# Altium PCB PCB1.PcbDoc
Units mil, origin at the board's own origin, x right, y up, seen from the top; angles counter-clockwise.
Board outline 1010 x 2190 mil, 2 copper layers (L1 (Signal), L4 (Signal)), stack 62.677 mil thick; 37 components, 48 nets, 169 pads, 49 vias.
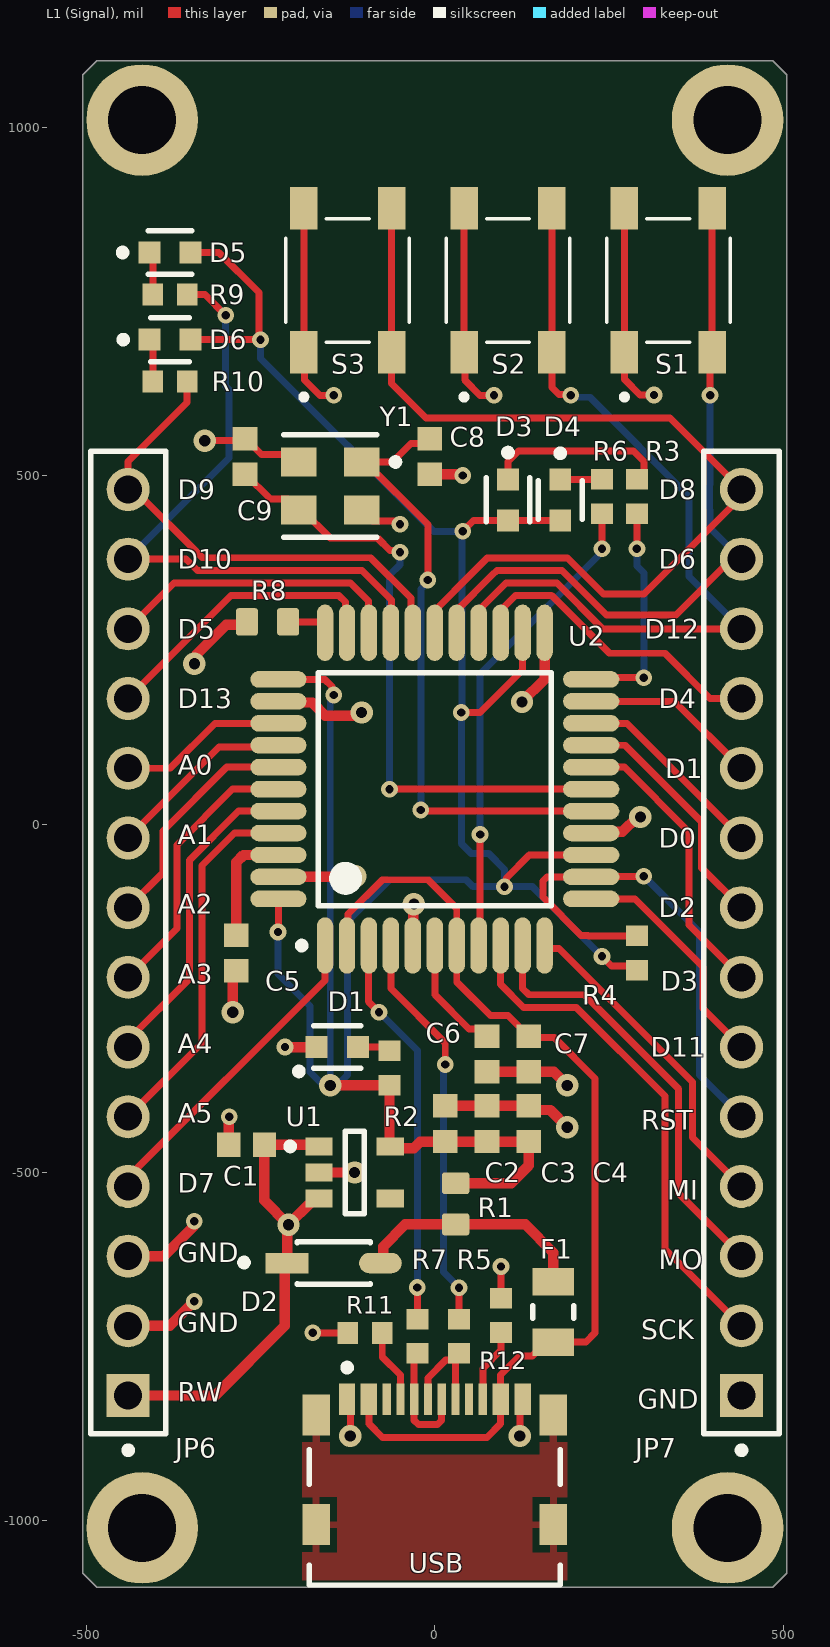
[diagram p0: L1 (Signal) view]
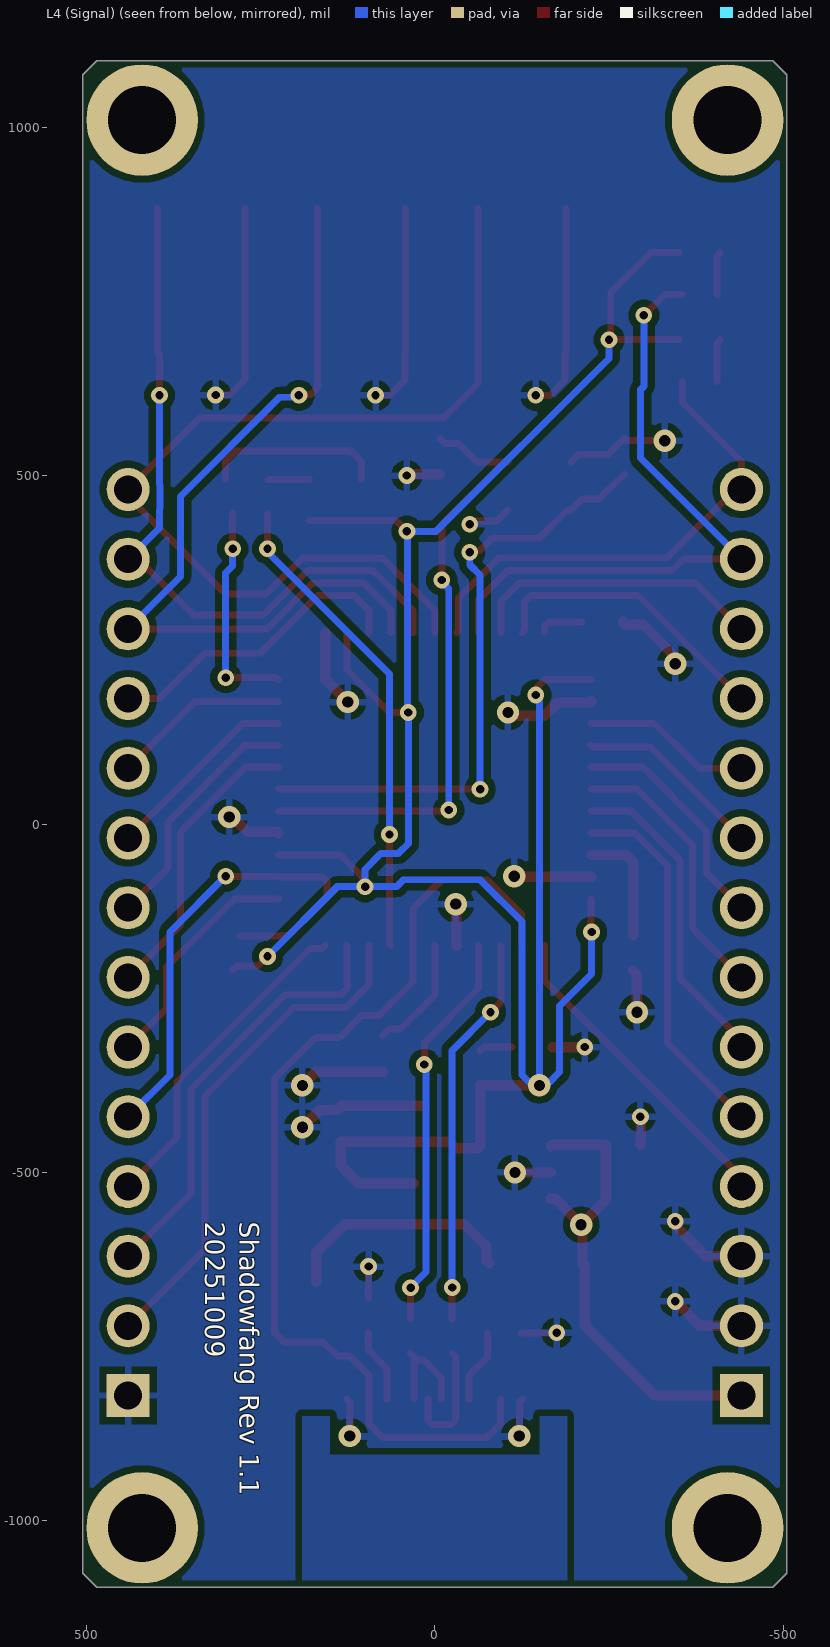
[diagram p1: L4 (Signal) view, seen from below]
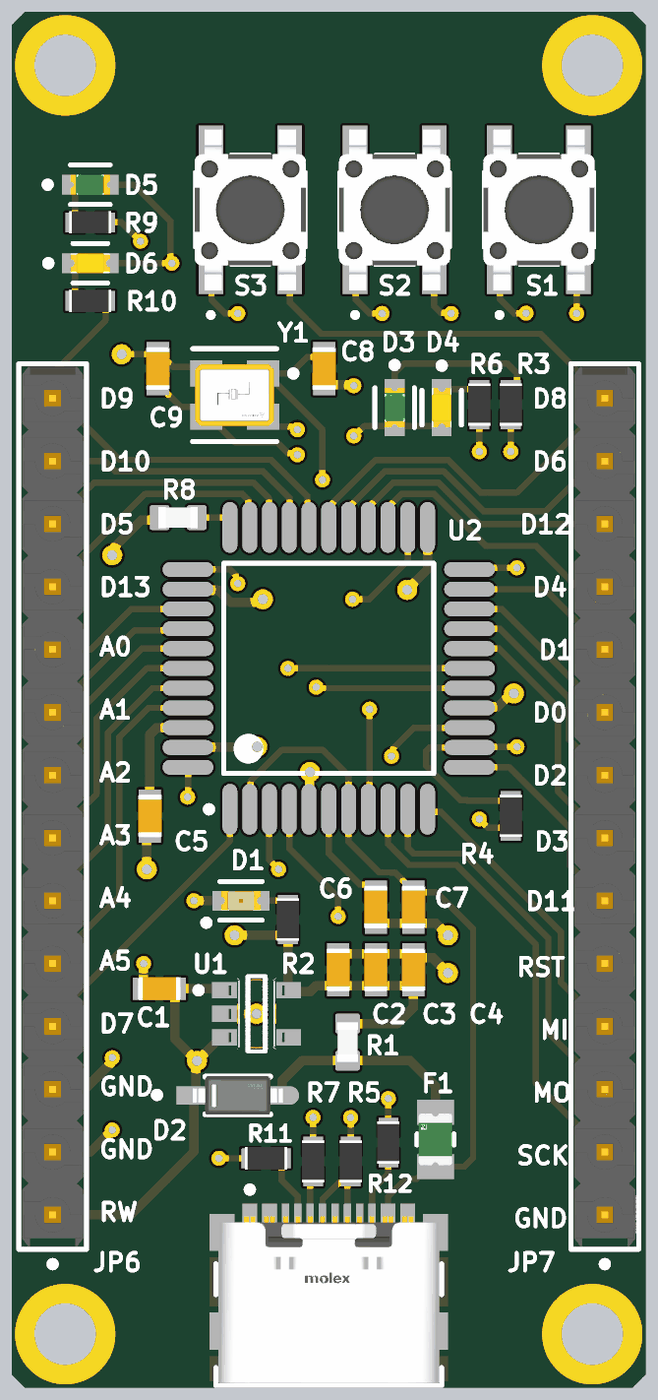
[diagram p2: 3D render of the assembled board from above, using the file's embedded part models]

## Layer stack, top to bottom
Top Solder: solder mask 0.4, Solder Resist, Dk 3.5
L1 (Signal): signal copper 1.378
Dielectric 2: core 59.9213, FR-4, Dk 4.6
L4 (Signal): signal copper 1.378
Bottom Solder: solder mask 0.4, Solder Resist, Dk 3.5

## Board outline
-505,-1075 -485,-1095 485,-1095 505,-1075 505,1075 485,1095 -485,1095 -505,1075

## Design rules (kind name [scope] priority, off if disabled: settings)
Clearance Clearance_PCBW [All] p1: gap=10 ignorepadtopadclearanceinfootprint=FALSE except(6: SMDPad-SMDPad; 8: Arc-Arc Arc-Track Arc-SMDPad Arc-THPad Track-Track Track-SMDPad Track-THPad)
Clearance [All] p2: gap=10 ignorepadtopadclearanceinfootprint=FALSE
MinimumSolderMaskSliver MinimumSolderMaskSliver_PCBWAY [All] p1: minsoldermaskwidth=6
MinimumSolderMaskSliver [All] p2: minsoldermaskwidth=10
PolygonConnect [All] p1: connectstyle=Relief reliefconductorwidth=10 reliefentries=4 polygonreliefangle="90 Angle" airgapwidth=10
RoutingVias RoutingVias_1 [All] p1: holewidth=12 width=24 viastyle="Through Hole" minholewidth=12 minwidth=24 maxholewidth=32 maxwidth=32
RoutingVias [All] p2: holewidth=28 width=50 viastyle="Through Hole" minholewidth=28 minwidth=50 maxholewidth=28 maxwidth=50
SilkToSilkClearance SilkToSilkClearance_PCBWAY [All] p1: silktosilkclearance=8
SilkToSilkClearance [All] p2: silktosilkclearance=10
SilkToSolderMaskClearance SilkToSolderMaskClearance_PCBWAY [IsPad] p1: minsilkscreentomaskgap=8 clearancetoexposedcopper=TRUE
SilkToSolderMaskClearance [IsPad] p2: minsilkscreentomaskgap=10 clearancetoexposedcopper=TRUE
SolderMaskExpansion [All] p1: expansion=4 istentingtop=FALSE
SupplyNets "Schematic Supply Nets_3" [InNet('SHIELD')] p1: voltage=0.000
SupplyNets "Schematic Supply Nets_2" [InNet('UVCC')] p2: voltage=0.000
SupplyNets "Schematic Supply Nets_1" [InNet('VCC')] p3: voltage=0.000
SupplyNets "Schematic Supply Nets" [InNet('GND')] p4: voltage=0.000
Width [All] p1: maxlimit=15 minlimit=10 preferedwidth=10 minimp=50.000000 maximp=50.000000 favimp=50.000000
27 further rules are at their usual default settings.

## Components (designator, comment, footprint, x,y, rotation, side; value= is the part's Value field where it differs from the comment)
C1 "CAP GENERIC 0603" CAPC1608X09L -270,-460 r0 top
C2 "CAP GENERIC 0603" CAPC1608X09L 15,-430 r270 top
C3 "CAP GENERIC 0603" CAPC1608X09L 75,-430 r270 top
C4 "CAP GENERIC 0603" CAPC1608X09L 135,-430 r270 top
C5 "CAP GENERIC 0603" CAPC1608X09L -285,-185 r90 top
C6 "CAP GENERIC 0603" CAPC1608X09L 75,-330 r90 top
C7 "CAP GENERIC 0603" CAPC1608X09L 135,-330 r90 top
C8 "CAP GENERIC 0603" CAPC1608X09L -7.34,527.33 r90 top
C9 "CAP GENERIC 0603" CAPC1608X09L -272.34,527.33 r270 top
D1 "Red" FP-LTST-C191KRKT-MFG -140,-320 r0 top
D2 "1N5819HW-7-F" FP-SOD123-IPC_A -145,-630 r0 top
D3 "Green" FP-LTST-C191KGKT-MFG 105,465 r270 top
D4 "Yellow" FP-LTST-C191KSKT-MFG 180,465 r270 top
D5 "Green" FP-LTST-C191KGKT-MFG -380,820 r0 top
D6 "Yellow" FP-LTST-C191KSKT-MFG -380,695 r0 top
F1 "0805L050WR" FP-0805L-MFG 170,-700 r90 top value=0.15-0.85Ω
JP6 "22-28-4146" FP-22-28-4146-MFG -440,-170 r90 top locked
JP7 "22-28-4146" FP-22-28-4146-MFG 440,-170 r90 top locked
R1 "0" RES_0603 30,-545 r90 top
R2 "GENERIC 0603 RESISTOR" RESC1608X06L -65,-350 r270 top
R3 "GENERIC 0603 RESISTOR" RESC1608X06L 290,470 r90 top
R4 "GENERIC 0603 RESISTOR" RESC1608X06L 290,-185 r90 top
R5 "GENERIC 0603 RESISTOR" RESC1608X06L 35,-735 r90 top
R6 "GENERIC 0603 RESISTOR" RESC1608X06L 240,470 r90 top
R7 "GENERIC 0603 RESISTOR" RESC1608X06L -25,-735 r90 top
R8 "0" RES_0603 -240,290 r180 top
R9 "GENERIC 0603 RESISTOR" RESC1608X06L -380,760 r180 top
R10 "GENERIC 0603 RESISTOR" RESC1608X06L -380,635 r180 top
R11 "GENERIC 0603 RESISTOR" RESC1608X06L -100,-730 r180 top
R12 "GENERIC 0603 RESISTOR" RESC1608X06L 95,-705 r90 top
S1 "PTS_647_SN50_SMTR2_LFS" SW_PTS_647_SN50_SMTR2_LFS 335.01,780 r90 top
S2 "PTS_647_SN50_SMTR2_LFS" SW_PTS_647_SN50_SMTR2_LFS 105,780 r90 top
S3 "PTS_647_SN50_SMTR2_LFS" SW_PTS_647_SN50_SMTR2_LFS -125,780 r90 top
U1 "MIC5219-5.0YM5-TR" FP-SOT23-5LD-PL-1-MFG -115,-500 r0 top
U2 "ATmega32U4-AU" 44ML_M 0,50 r90 top locked
USB "217179-0001" FP-2171790001-MFG 0,-960 r0 top locked
Y1 "ABM8-16.000MHZ-B2-T" FP-ABM8-MFG -150,485 r180 top

## Footprints (in the part's own frame and the unit in brackets; to place one, negate y for a bottom-side part, rotate by r counter-clockwise, add the part's x,y. Pads: shape width x height; smd on the part's side, far side on the other; paste and mask are expansions set on the pad)
44ML_M [mm] "Thin QFP, 44-Leads, Body 10x10mm, Pitch 0.8mm, IPC Low Density"
  oval 2.05x0.6 smd: 1(-5.7,4) 2(-5.7,3.2) 3(-5.7,2.4) 4(-5.7,1.6) 5(-5.7,0.8) 6(-5.7,0) 7(-5.7,-0.8) 8(-5.7,-1.6) 9(-5.7,-2.4) 10(-5.7,-3.2) 11(-5.7,-4) 23(5.7,-4) 24(5.7,-3.2) 25(5.7,-2.4) 26(5.7,-1.6) 27(5.7,-0.8) 28(5.7,0) 29(5.7,0.8) 30(5.7,1.6) 31(5.7,2.4) 32(5.7,3.2) 33(5.7,4)
  oval 0.6x2.05 smd: 12(-4,-5.7) 13(-3.2,-5.7) 14(-2.4,-5.7) 15(-1.6,-5.7) 16(-0.8,-5.7) 17(0,-5.7) 18(0.8,-5.7) 19(1.6,-5.7) 20(2.4,-5.7) 21(3.2,-5.7) 22(4,-5.7) 34(4,5.7) 35(3.2,5.7) 36(2.4,5.7) 37(1.6,5.7) 38(0.8,5.7) 39(0,5.7) 40(-0.8,5.7) 41(-1.6,5.7) 42(-2.4,5.7) 43(-3.2,5.7) 44(-4,5.7)
  silkscreen extent -5.82,-4.25 4.25,4.97, body extent -5,-5 5,5, height 1.2
CAPC1608X09L [mm] "Chip Capacitor, 2-Leads, Body 1.60x0.80mm, IPC High Density"
  rect 0.85x0.9 smd: 1(-0.65,0) 2(0.65,0)
  body extent -0.87,-0.48 0.87,0.48, height 0.9
FP-22-28-4146-MFG [mm]
  rect 1.57x1.57 hole 1.02 paste-2539.97 mask+0: 1(-16.51,0)
  round 1.57 hole 1.02 paste-2539.97 mask+0: 2(-13.97,0) 3(-11.43,0) 4(-8.89,0) 5(-6.35,0) 6(-3.81,0) 7(-1.27,0) 8(1.27,0) 9(3.81,0) 10(6.35,0) 11(8.89,0) 12(11.43,0) 13(13.97,0) 14(16.51,0)
  silkscreen extent -18.63,-1.37 17.91,1.37, body extent -18.01,-1.47 18.01,1.47, height 0.25
FP-0805L-MFG [mm]
  rect 1x1.5 smd paste+0 mask+0: 1(-1.1,0) 2(1.1,0)
  silkscreen extent -0.23,-0.75 0.23,0.75, body extent -1.7,-0.85 1.7,0.85, height 0.25
FP-2171790001-MFG [mm]
  rect 1x1.5 smd paste+0 mask+0: 1(-4.32,2.85) 2(4.32,2.85) 3(-4.32,-1.15) 4(4.32,-1.15)
  rect 0.6x1.15 smd paste+0 mask+0: A1-B12(-3.2,3.425) A4-B9(-2.4,3.425) B1-A12(3.2,3.425) B4-A9(2.4,3.425)
  rect 0.3x1.15 smd paste+0 mask+0: A5(-1.25,3.425) A6(-0.25,3.425) A7(0.25,3.425) A8(1.25,3.425) B5(1.75,3.425) B6(0.75,3.425) B7(-0.75,3.425) B8(-1.75,3.425)
  silkscreen extent -4.57,-3.35 4.57,4.7, body extent -4.92,-3.45 4.92,4.1, height 0.25
FP-ABM8-MFG [mm]
  rect 1.3x1.05 smd paste+0 mask+0: 1(-1.15,-0.875) 2(1.15,-0.875) 3(1.15,0.875) 4(-1.15,0.875)
  silkscreen extent -2.5,-1.88 1.7,1.88, body extent -1.9,-1.5 1.9,1.5, height 0.25
FP-LTST-C191KGKT-MFG [mm]
  rect 0.8x0.8 smd paste+0 mask+0: 1(-0.75,0) 2(0.75,0)
  silkscreen extent -1.85,-0.8 0.8,0.8, body extent -1.25,-0.55 1.25,0.55, height 0.25
FP-LTST-C191KRKT-MFG [mm]
  rect 0.8x0.8 smd paste+0 mask+0: 1(-0.75,0) 2(0.75,0)
  silkscreen extent -1.52,-1.01 0.86,0.78, body extent -1.25,-0.55 1.25,0.55, height 0.25
FP-LTST-C191KSKT-MFG [mm]
  rect 0.8x0.8 smd paste+0 mask+0: 1(-0.75,0) 2(0.75,0)
  silkscreen extent -1.82,-0.8 0.7,0.8, body extent -1.25,-0.55 1.25,0.55, height 0.25
FP-SOD123-IPC_A [mil]
  rect 61.32x29.23 smd paste+0 mask+0: 1(-66.94,0)
  rrect100% 61.32x29.23 smd paste+0 mask+0: 2(66.94,0)
  silkscreen extent -134,-31 52,31, body extent -117,-50 117,50, height 10
FP-SOT23-5LD-PL-1-MFG [mm]
  rect 1x0.66 smd paste+0 mask+0: 1(-1.3,0.95) 2(-1.3,0) 3(-1.3,-0.95) 4(1.3,-0.95) 5(1.3,0.95)
  silkscreen extent -2.47,-1.5 0.35,1.5, body extent -1.9,-1.6 1.9,1.6, height 0.25
RES_0603 [mm]
  rrect25% 0.8x1 smd: 1(-0.75,0) 2(0.75,0)
  body extent -0.8,-0.43 0.8,0.43, height 0.52
RESC1608X06L [mm] "Chip Resistor, 2-Leads, Body 1.60x0.80mm, IPC High Density"
  rect 0.75x0.8 smd: 1(-0.625,0) 2(0.625,0)
  body extent -0.85,-0.45 0.85,0.45, height 0.55
SW_PTS_647_SN50_SMTR2_LFS [mm]
  rect 1.55x1 smd: 1(-2.625,1.6) 2(2.625,1.6) 3(-2.625,-1.6) 4(2.625,-1.6)
  silkscreen extent -4.35,-2.25 2.25,2.25, body extent -3.25,-2.25 3.25,2.25, height 5

## Part data
C1 C2: library part CAP0603, Capacitance=10uF, Manufacturer Part Number=GRM188R61C106MAALD
C3 C6 C7: library part CAP0603, Capacitance=1uF, Manufacturer Part Number=GCM188R71E105KA64D
C4 C5: library part CAP0603, Capacitance=0.1uF, Manufacturer Part Number=GCM188R71H104KA57D
C8 C9: library part CAP0603, Capacitance=22pF, Manufacturer Part Number=GCM1885C2A220FA16D
D1: library part CMP-2000-05199-2, Case Code (Imperial)=0603, Case Code (Metric)=1608, Current=2A, Forward Current=20mA, Forward Voltage=2V, Lens Color=Colorless, Manufacturer="Vishay Lite-On", Manufacturer Part Number=LTST-C191KRKT, Max Operating Temperature=85°C, Min Operating Temperature=-55°C, Power Dissipation=75mW, Reverse Voltage=5V, Supplier Part Number=160-1447-1-ND, Case/Package=0603, Category=LEDs, Channels=1, Color=Red, Color@wavelength=Red, ComponentLink1Description=https://datasheet.ciiva.com:443/pdfs/VipMasterIC/IC/LITE/LITE-S-A0003156012/LITE-S-A0003156012-1.pdf?src-supplier=IHS+Markit, ComponentLink1URL=https://datasheet.ciiva.com:443/pdfs/VipMasterIC/IC/LITE/LITE-S-A0003156012/LITE-S-A0003156012-1.pdf?src-supplier=IHS+Markit, ComponentLink2Description=https://datasheet.ciiva.com/16212/ltst-c191krkt-16212419.pdf?src-supplier=Future+Electronics, ComponentLink2URL=https://datasheet.ciiva.com/16212/ltst-c191krkt-16212419.pdf?src-supplier=Future+Electronics, ComponentLink3Description=https://datasheet.ciiva.com/12400/lite-on-ltst-c191krkt-190135-12400910.pdf?src-supplier=Mouser, ComponentLink3URL=https://datasheet.ciiva.com/12400/lite-on-ltst-c191krkt-190135-12400910.pdf?src-supplier=Mouser, ComponentLink4Description=https://datasheet.ciiva.com/11773/0900766b80dc02b2-11773601.pdf?src-supplier=Rs, ComponentLink4URL=https://datasheet.ciiva.com/11773/0900766b80dc02b2-11773601.pdf?src-supplier=Rs, ComponentLink5Description=https://datasheet.ciiva.com/15117/getdatasheetpartid-141922-15117737.pdf?src-supplier=Verical, ComponentLink5URL=https://datasheet.ciiva.com/15117/getdatasheetpartid-141922-15117737.pdf?src-supplier=Verical, ComponentLink6Description=https://datasheet.ciiva.com/2109/s-110-ltst-c191krkt-2109970.pdf?src-supplier=Digikey, ComponentLink6URL=https://datasheet.ciiva.com/2109/s-110-ltst-c191krkt-2109970.pdf?src-supplier=Digikey, ComponentLink7Description=https://datasheet.ciiva.com/2109/s-110-ltst-c191krkt-2109971.pdf?src-supplier=Digikey, ComponentLink7URL=https://datasheet.ciiva.com/2109/s-110-ltst-c191krkt-2109971.pdf?src-supplier=Digikey, ComponentLink8Description=https://datasheet.ciiva.com/2109/s-110-ltst-c191krkt-2109972.pdf?src-supplier=Digikey, ComponentLink8URL=https://datasheet.ciiva.com/2109/s-110-ltst-c191krkt-2109972.pdf?src-supplier=Digikey, Depth=800µm, Dominant Wavelength=631nm, Height=550µm, Illumination Color=Red, JESD-609 Code=e3, Lead Free="Lead Free", Length=1.6mm, Lens Style=Clear, Lens Transparency=Clear, Luminous Intensity=54mcd, Luminous Intensity-Nom=54mcd, Mount="Surface Mount", Mounting Technology="Surface Mount", NexarPartId=549908, Number of Elements=1, Number of LEDs=1, Number of Pins=2, Optoelectronic Device Type="SINGLE COLOR LED", Overall Height=0.55mm, Packaging="Tape and Reel", Pins=2, Power Rating=75mW, Pricing="1=0.15, 10=0.1, 100=0.0687, 500=0.05446, 1000=0.0497, 2000=0.04563, 5000=0.04114, 10000=0.03833, 15000=0.03689, 25000=0.03525, 35000=0.03428, 50000=0.03333, 125000=0.03123, 250000=0.02992 (USD)", Radiation Hardening=No, Reach SVHC Compliant=Yes, Reverse Voltage-Max=5V, RoHS=Compliant, RoHS Compliant=Yes, Schedule B="8541402000, 8541402000", Shape=Rectangular, Size=1.1mm, Stock=867088, Supplier=Digikey, Terminal Finish=Tin, Terminal Pitch=1.5mm, Test Current=20mA, Viewing Angle=130°, Voltage=2V, Wavelength=639nm, Width=800µm
D2: library part CMP-0303-00003-3, "DIODE SCHOTTKY 40V 1A SOD123", Average Rectified Current=1A, Capacitance=110pF, Case/Package=SOD-123-2, Forward Voltage=450mV, Manufacturer=Diodes, Max Forward Surge Current (Ifsm)=25A, Max Operating Temperature=125°C, Max Power Dissipation=450mW, Max Repetitive Reverse Voltage (Vrrm)=40V, Min Operating Temperature=-65°C, Package Body Material=Plastic, Package Quantity=3000, Package Shape=Rectangular, Package Style="SMALL OUTLINEMeter", Peak Reflow Temperature (Cel)=260°C, Peak Reverse Current=50uA, Supplier Part Number=1N5819HW-FDICT-ND, Time @ Peak Reflow Temperature-Max (s)=40s, Category="Schottky Diodes", ComponentLink1Description=https://datasheet.ciiva.com:443/pdfs/VipMasterIC/IC/DIOD/DIOD-S-A0009689747/DIOD-S-A0009691035-1.pdf?src-supplier=IHS+Markit, ComponentLink1URL=https://datasheet.ciiva.com:443/pdfs/VipMasterIC/IC/DIOD/DIOD-S-A0009689747/DIOD-S-A0009691035-1.pdf?src-supplier=IHS+Markit, Contact Plating=Tin, Current Rating=1A, Diode Element Material=SILICON, Diode Type=RECTIFIER, Element Configuration=Single, Forward Current=1A, Height=1.25mm, JESD-30 Code=R-PDSO-G2, JESD-609 Code=e3, Lead Free="Lead Free", Length=2.85mm, Manufacturer Part Number=1N5819HW-7-F, Max Output current=1A, Max Reverse Voltage (DC)=40V, Moisture Sensitivity Level=1, Non-rep Pk Forward Current-Max=25A, Number of Elements=1, Number of Pins=2, Output Current=1A, Packaging="Tape and Reel", Peak Non-Repetitive Surge Current=25A, Pins=2, Polarity=Standard, Pricing="1=0.23, 10=0.143, 100=0.1103, 500=0.09626, 1000=0.08516, 3000=0.05656, 6000=0.0532, 9000=0.05304, 15000=0.03424 (USD)", Qualification Status="Not Qualified", Radiation Hardening=No, REACH SVHC="No SVHC", Reach SVHC Compliant=Yes, Rep Pk Reverse Voltage-Max=40V, RoHS=Yes, RoHS Compliant=Yes, Stock=233752, Supplier=Digikey, Surface Mount=Yes, Technology=SCHOTTKY, Terminal Finish=Tin, Terminal Form="Gull Wing", Terminal Position=DUAL, Termination=SMD/SMT, Voltage Rating (DC)=40V, Weight=0.000353oz, Width=1.7mm
D3 D5: library part CMP-2000-05198-4, "LED GREEN CLEAR SMD", Case Code (Imperial)=0603, Case Code (Metric)=1608, Forward Current=20mA, Forward Voltage=2V, Lens Color="Clear, Colorless", Manufacturer="Vishay Lite-On", Manufacturer Part Number=LTST-C191KGKT, Max Operating Temperature=85°C, Min Operating Temperature=-55°C, Power Dissipation=75mW, Reverse Voltage=5V, Supplier Part Number=160-1446-1-ND, Case/Package=0603, Channels=1, Color=Green, Color@wavelength=Green, ComponentLink1Description=https://datasheet.ciiva.com:443/pdfs/VipMasterIC/IC/LITE/LITE-S-A0003156116/LITE-S-A0003156116-1.pdf?src-supplier=IHS+Markit, ComponentLink1URL=https://datasheet.ciiva.com:443/pdfs/VipMasterIC/IC/LITE/LITE-S-A0003156116/LITE-S-A0003156116-1.pdf?src-supplier=IHS+Markit, ComponentLink2Description=https://datasheet.ciiva.com/2109/ltst-c191kgkt-2109973.pdf?src-supplier=Digikey, ComponentLink2URL=https://datasheet.ciiva.com/2109/ltst-c191kgkt-2109973.pdf?src-supplier=Digikey, Depth=800µm, Dominant Wavelength=571nm, Height=550µm, Illumination Color=Green, JESD-609 Code=e3, Lead Free="Lead Free", Length=1.6mm, Lens Style=Clear, Lens Transparency=Clear, Luminous Intensity=35mcd, Luminous Intensity-Nom=35mcd, Mount="Surface Mount", Mounting Technology="Surface Mount", NexarPartId=549907, Number of Elements=1, Number of LEDs=1, Number of Pins=2, Optoelectronic Device Type="SINGLE COLOR LED", Overall Height=0.55mm, Packaging="Tape and Reel", Pins=2, Power Rating=75mW, Pricing="1=0.15, 10=0.1, 100=0.0688, 500=0.05448, 1000=0.04972, 2000=0.04564, 5000=0.04116, 10000=0.03835, 15000=0.0369, 25000=0.03527, 35000=0.03429, 50000=0.03334, 125000=0.03124, 250000=0.02993 (USD)", Radiation Hardening=No, Reach SVHC Compliant=Yes, Reverse Voltage-Max=5V, RoHS=Compliant, RoHS Compliant=Yes, Schedule B="8541402000, 8541402000", Shape=Rectangular, Size=1.1mm, Stock=1664852, Supplier=Digikey, Terminal Finish=Tin, Terminal Pitch=1.5mm, Test Current=20mA, Viewing Angle=130°, Wavelength=574nm, Width=800µm
D4 D6: library part CMP-22017-000025-1, "LED YELLOW CLEAR SMD", Case Code (Imperial)=0603, Case Code (Metric)=1608, Forward Current=30mA, Forward Voltage=2.4V, Lens Color=Colorless, Manufacturer="Vishay Lite-On", Manufacturer Part Number=LTST-C191KSKT, Max Operating Temperature=85°C, Min Operating Temperature=-55°C, Package Quantity=1, Power Dissipation=75mW, Reverse Voltage=5V, Supplier Part Number=160-1448-1-ND, Test Current=20mA, Case/Package=0603, Category=LEDs, Channels=1, Color=Yellow, Color@wavelength=Yellow, ComponentLink1Description=https://datasheet.ciiva.com:443/pdfs/VipMasterIC/IC/LITE/LITE-S-A0008870965/LITE-S-A0008870965-1.pdf?src-supplier=IHS+Markit, ComponentLink1URL=https://datasheet.ciiva.com:443/pdfs/VipMasterIC/IC/LITE/LITE-S-A0008870965/LITE-S-A0008870965-1.pdf?src-supplier=IHS+Markit, ComponentLink2Description=https://datasheet.ciiva.com/12400/lite-on-ltst-c191kskt-190097-12400797.pdf?src-supplier=Mouser, ComponentLink2URL=https://datasheet.ciiva.com/12400/lite-on-ltst-c191kskt-190097-12400797.pdf?src-supplier=Mouser, ComponentLink3Description=https://datasheet.ciiva.com/11773/0900766b80dc02b3-11773512.pdf?src-supplier=Rs, ComponentLink3URL=https://datasheet.ciiva.com/11773/0900766b80dc02b3-11773512.pdf?src-supplier=Rs, ComponentLink4Description=https://datasheet.ciiva.com/16213/lite-on20ltst-c191kskt-16213725.pdf?src-supplier=Future+Electronics, ComponentLink4URL=https://datasheet.ciiva.com/16213/lite-on20ltst-c191kskt-16213725.pdf?src-supplier=Future+Electronics, ComponentLink5Description=https://datasheet.ciiva.com/15117/getdatasheetpartid-141495-15117732.pdf?src-supplier=Verical, ComponentLink5URL=https://datasheet.ciiva.com/15117/getdatasheetpartid-141495-15117732.pdf?src-supplier=Verical, ComponentLink6Description=https://datasheet.ciiva.com/2109/s-110-ltst-c191kskt-2109984.pdf?src-supplier=Digikey, ComponentLink6URL=https://datasheet.ciiva.com/2109/s-110-ltst-c191kskt-2109984.pdf?src-supplier=Digikey, Depth=0.8mm, Dominant Wavelength=597nm, Height=0.55mm, Illumination Color=Yellow, JESD-609 Code=e3, Lead Free="Lead Free", Length=1.6mm, Lens Style=Diffused, Lens Transparency=Clear, Luminous Intensity=180mcd, Luminous Intensity-Nom=104mcd, Mount="Surface Mount", Mounting Technology="Surface Mount", Number of Elements=1, Number of LEDs=1, Number of Pins=2, Optoelectronic Device Type="SINGLE COLOR LED", Overall Height=0.55mm, Packaging="Tape and Reel", Pins=2, Power Rating=75mW, Pricing="1=0.15, 10=0.105, 100=0.0723, 500=0.05736, 1000=0.05238, 2000=0.04813, 5000=0.04344, 10000=0.0405, 15000=0.03899, 25000=0.03728, 35000=0.03627, 50000=0.03527, 125000=0.03308, 250000=0.03171 (USD)", Radiation Hardening=No, Reach SVHC Compliant=Yes, Reverse Voltage-Max=5V, RoHS=Yes, RoHS Compliant=Yes, Shape=Rectangular, Size=1.1mm, Stock=620459, Supplier=Digikey, Terminal Finish=Tin, Terminal Pitch=1.5mm, Viewing Angle=130°, Wavelength=588nm, Width=0.8mm
F1: library part CMP-08606-000023-1, "PTC RESET FUSE 6V 500MA 0805", Ambient Temperature Range High=+85°C, Ambient Temperature Range Low=-40°C, Current Rating=100A, Hold Current=0.5A, Manufacturer="Littelfuse Inc.", Package=0805L, Resistance=0.15-0.85Ω, Temperature="-40°C to +85°C", Trip Current=1A, Voltage Rating=6V, Automotive=No, Category=Fuse, ComponentLink2Description=Datasheet, ComponentLink2URL=https://www.littelfuse.com/~/media/electronics/datasheets/resettable_ptcs/littelfuse_ptc_0805l_datasheet.pdf.pdf, Device Class L1="Circuit Protection", Device Class L2="PTC Resettable Fuses", Device Class L3=unset, Digikey Description="PTC RESET FUSE 6V 500MA 0805", Height=1.25mm, Lead Free=Yes, Manufacturer Part Number=0805L050WR, Mouser Description="PTC Resettable Fuse 0.5A(hold) 1A(trip) 6VDC 100A 0.5W 0.1s 0.15Ohm SMD Solder Pad 0805 T/R", Octopart=https://octopart.com/0805l050wr-littelfuse-673858, RoHS=TRUE, Temperature Range High=+85°C, Temperature Range Low=-40°C, Trip Time=0.1s
JP6 JP7: "CONN HEADER VERT 14POS 2.54MM", Color=Black, Contact Resistance=10mR, Current Rating=4A, Flammability Rating="UL94 V-0", Insulation Resistance=1GR, Manufacturer=Molex, Manufacturer Series=42375, Package Quantity=1, Supplier Part Number=WM24210-ND, Voltage Rating=250V, Body Breadth=0.098inch, Body Depth=0.09inch, Body Length=1.4inch, Body/Shell Style=RECEPTACLE, Category="Headers and Wire Housings", ComponentLink1Description=https://datasheet.ciiva.com:443/pdfs/VipMasterIC/IC/MOLE/MOLE-S-A0003536348/MOLE-S-A0003536348-1.pdf?src-supplier=IHS+Markit, ComponentLink1URL=https://datasheet.ciiva.com:443/pdfs/VipMasterIC/IC/MOLE/MOLE-S-A0003536348/MOLE-S-A0003536348-1.pdf?src-supplier=IHS+Markit, ComponentLink2Description=https://datasheet.ciiva.com/6814/022284363-sd-6814049.pdf?src-supplier=Digikey, ComponentLink2URL=https://datasheet.ciiva.com/6814/022284363-sd-6814049.pdf?src-supplier=Digikey, ComponentLink3Description=https://datasheet.ciiva.com/10079/0022284146-pcb-headers-10079164.pdf?src-supplier=Avnet, ComponentLink3URL=https://datasheet.ciiva.com/10079/0022284146-pcb-headers-10079164.pdf?src-supplier=Avnet, ComponentLink4Description=https://datasheet.ciiva.com/5163/0022284146-pcb-headers-228333-5163807.pdf?src-supplier=Mouser, ComponentLink4URL=https://datasheet.ciiva.com/5163/0022284146-pcb-headers-228333-5163807.pdf?src-supplier=Mouser, Connector Type="Male Pin", Contact Finish - Mating="NOT SPECIFIED", Contact Finish - Termination="TIN OVER NICKEL", Contact Gender=Male, Contact Material=Brass, Contact Mating Length=0.24inch, Contact Pattern=RECTANGULAR, Contact Plating=Gold, Contact Style="SQ PIN-SKT", Contact Type="Male Pin", DIN Conformance=No, Filter Feature=No, Gender=Male, Glow Wire Compliant=Non-compliant, Height=2.29mm, Housing Color=Black, Housing Material=Thermoplastic, IEC Conformance=No, Insertion Force-Max=4.8928N, Insulation Color=Black, Insulation Material=Nylon, Lead Free="Lead Free", Length=35.6mm, Manufacturer Part Number=22-28-4146, Mating Contact Pitch=0.1inch, Mating Information="MULTIPLE MATING PARTS AVAILABLE", MIL Conformance=No, Mixed Contacts=No, Mount="Through Hole", Mounting Option 1=LOCKING, Mounting Style=STRAIGHT, Mounting Technology=Board, Number of Circuits=14, Number Of Connectors=1, Number of Contacts=14, Number Of PCB Rows=1, Number of Positions=14, Number of Rows=1, Number of Rows Loaded=1, Option="General Purpose", Orientation=Vertical, Packaging=Bulk, PCB Contact Pattern=RECTANGULAR, Pitch=0.1inch, Plating Thickness=100uin, Pricing="1=0.91, 10=0.772, 100=0.6562, 500=0.58568, 1000=0.55772, 5000=0.49786, 10000=0.47411 (USD)", Reach SVHC Compliant=Yes, Reference Standard=UL, Reliability=COMMERCIAL, RoHS=Yes, RoHS Compliant=Yes, Series="KK® 42375", Stock=4272, Supplier=Digikey, Terminal Length=0.125inch, Terminal Pitch=2.54mm, Termination=Solder, Width=2.49mm, Withdrawl Force-Min=0.556N
R1 R8: library part CRCW06030000Z0EA, "Metal Glaze/thick Film, 0.1W, 0ohm, Surface Mount, 0603", Case/Package=0603, Manufacturer=Vishay, Max Operating Temperature=155°C, Min Operating Temperature=-55°C, Package Height=0.45mm, Package Length=1.55mm, Package Shape=Rectangular, Package Width=0.85mm, Power=100mW, Rated Temperature=70°C, Resistor Type="FIXED RESISTOR", Supplier Part Number=541-0.0GCT-ND, Category="Chip SMD Resistors", ComponentLink1Description=https://datasheet.ciiva.com:443/pdfs/VipMasterIC/IC/VISH/VISH-S-A0007266705/VISH-S-A0007266705-1.pdf?src-supplier=IHS+Markit, ComponentLink1URL=https://datasheet.ciiva.com:443/pdfs/VipMasterIC/IC/VISH/VISH-S-A0007266705/VISH-S-A0007266705-1.pdf?src-supplier=IHS+Markit, ComponentLink2Description=http://www.farnell.com/datasheets/2310790.pdf?src-supplier=Farnell, ComponentLink2URL=http://www.farnell.com/datasheets/2310790.pdf?src-supplier=Farnell, ComponentLink3Description=http://www.farnell.com/datasheets/2310790.pdf?src-supplier=Element14, ComponentLink3URL=http://www.farnell.com/datasheets/2310790.pdf?src-supplier=Element14, ComponentLink4Description=http://datasheet.octopart.com/CRCW06030000Z0EA-Vishay-datasheet-14722531.pdf?src-supplier=Avnet, ComponentLink4URL=http://datasheet.octopart.com/CRCW06030000Z0EA-Vishay-datasheet-14722531.pdf?src-supplier=Avnet, ComponentLink5Description=https://datasheet.octopart.com/CRCW06030000Z0EA-Vishay-datasheet-14722531.pdf?src-supplier=Newark, ComponentLink5URL=https://datasheet.octopart.com/CRCW06030000Z0EA-Vishay-datasheet-14722531.pdf?src-supplier=Newark, ComponentLink6Description=http://datasheet.octopart.com/CRCW06030000Z0EA-Vishay-datasheet-14722531.pdf?src-supplier=Mouser, ComponentLink6URL=http://datasheet.octopart.com/CRCW06030000Z0EA-Vishay-datasheet-14722531.pdf?src-supplier=Mouser, ComponentLink7Description=https://datasheet.octopart.com/CRCW06030000Z0EA-Vishay-datasheet-5300368.pdf?src-supplier=Future+Electronics, ComponentLink7URL=https://datasheet.octopart.com/CRCW06030000Z0EA-Vishay-datasheet-5300368.pdf?src-supplier=Future+Electronics, ComponentLink8Description=http://datasheet.octopart.com/CRCW06030000Z0EA-Vishay-datasheet-14722531.pdf?src-supplier=Distrelec, ComponentLink8URL=http://datasheet.octopart.com/CRCW06030000Z0EA-Vishay-datasheet-14722531.pdf?src-supplier=Distrelec, ComponentLink9Description=http://www.vishay.com/docs/20035/dcrcwe3.pdf?src-supplier=Digikey, ComponentLink9URL=http://www.vishay.com/docs/20035/dcrcwe3.pdf?src-supplier=Digikey, ComponentLink10Description=https://datasheet.octopart.com/CRCW06030000Z0EA-Vishay-datasheet-62317933.pdf?src-supplier=Element14, ComponentLink10URL=https://datasheet.octopart.com/CRCW06030000Z0EA-Vishay-datasheet-62317933.pdf?src-supplier=Element14, ComponentLink11Description=http://www.farnell.com/datasheets/2310790.pdf?src-supplier=Newark, ComponentLink11URL=http://www.farnell.com/datasheets/2310790.pdf?src-supplier=Newark, ComponentLink12Description=http://datasheet.octopart.com/CRCW06030000Z0EA-Vishay-datasheet-14722531.pdf?src-supplier=Freelance+Electronics, ComponentLink12URL=http://datasheet.octopart.com/CRCW06030000Z0EA-Vishay-datasheet-14722531.pdf?src-supplier=Freelance+Electronics, ComponentLink13Description=http://datasheet.octopart.com/CRCW06030000Z0EA-Vishay-datasheet-14722531.pdf?src-supplier=Quest, ComponentLink13URL=http://datasheet.octopart.com/CRCW06030000Z0EA-Vishay-datasheet-14722531.pdf?src-supplier=Quest, ComponentLink14Description=http://datasheet.octopart.com/CRCW06030000Z0EA-Vishay-datasheet-14722531.pdf?src-supplier=Component+Sense, ComponentLink14URL=http://datasheet.octopart.com/CRCW06030000Z0EA-Vishay-datasheet-14722531.pdf?src-supplier=Component+Sense, ComponentLink15Description=http://datasheet.octopart.com/CRCW06030000Z0EA-Vishay-datasheet-14722531.pdf?src-supplier=New+Yorker+Electronics, ComponentLink15URL=http://datasheet.octopart.com/CRCW06030000Z0EA-Vishay-datasheet-14722531.pdf?src-supplier=New+Yorker+Electronics, Construction=Chip, JESD-609 Code=e3, Manufacturer Part Number=CRCW06030000Z0EA, Mounting Technology="Surface Mount", Packaging="Tape and Reel", Pins=2, Pricing="1=0.1, 10=0.028, 25=0.0216, 50=0.0164, 100=0.0115, 250=0.00928, 500=0.00742, 1000=0.00546, 5000=0.00501, 10000=0.00434, 15000=0.004, 25000=0.00362, 35000=0.00339, 50000=0.00318, 125000=0.0027, 250000=0.0025 (USD)", Reach SVHC Compliant=Yes, Reference Standard=AEC-Q200, Resistance=0, RoHS=Yes, RoHS Compliant=Yes, Stock=1285178, Supplier=Digikey, Technology="METAL GLAZE/THICK FILM", Terminal Finish=Nickel, Termination=Wraparound
R2: library part RES0603, Manufacturer Part Number=CRCW06031K00FKEAHP, Resistance (Ohms)=1k
R3 R6 R9 R10: library part RES0603, Manufacturer Part Number=CRCW0603330RFKEAHP, Resistance (Ohms)=330
R4: library part RES0603, Manufacturer Part Number=CRCW060310K0FKEAHP, Resistance (Ohms)=10K
R5 R7: library part RES0603, Manufacturer Part Number=CRCW060322R0JNEAHP, Resistance (Ohms)=22
R11 R12: library part RES0603, Manufacturer Part Number=CRCW060322R0JNEAHP, Resistance (Ohms)=5.1k
S1 S2 S3: "Tactile Switch SPST-NO Top Actuated Surface Mount", Manufacturer Part Number=Y97KT23B0FAFP, Package=None, Check_prices=https://www.snapeda.com/parts/PTS%20647%20SN50%20SMTR2%20LFS/C%2526K/view-part/?ref=eda, MF=C&K, MP="PTS 647 SN50 SMTR2 LFS", SnapEDA_Link=https://www.snapeda.com/parts/PTS%20647%20SN50%20SMTR2%20LFS/C%2526K/view-part/?ref=snap
U1: library part CMP-06324-000019-1, "IC REG LINEAR 5V 500MA SOT23-5", Ambient Temperature Range High=+125°C, Ambient Temperature Range Low=-40°C, Dropout Voltage=350mV, Manufacturer="Microchip Technology", Max Supply Voltage=12V, Min Supply Voltage=2.5V, Nominal Supply Current=80-12000uA, Output Current=500mA, Output Voltage=5V, Package=SOT23-5LD-PL-1, Temperature="-40°C to +125°C", Accuracy Percentage=1%, Automotive=No, Category=IC, ComponentLink2Description=Datasheet, ComponentLink2URL=http://ww1.microchip.com/downloads/en/DeviceDoc/MIC5219-500mA-Peak-Output-LDO-Regulator-DS20006021A.pdf, Device Class L1="Integrated Circuits (ICs)", Device Class L2="Power Management ICs", Device Class L3="Voltage Regulators - Linear", Digikey Description="IC REG LINEAR 5V 500MA SOT23-5", Height=1.45mm, Lead Free=Yes, Manufacturer Part Number=MIC5219-5.0YM5-TR, Max Junction Temp=+125°C, Mouser Description="IC REG LINEAR 5V 500MA SOT23-5", Number Of Outputs=1, Octopart=https://octopart.com/mic5219-5.0ym5-tr-microchip-66802269, Output Type=Fixed, RoHS=TRUE, Standoff Height=0mm, Temperature Range High=+125°C, Temperature Range Low=-40°C
U2: library part CMP-0095-00285-2, "8-bit AVR Microcontroller, 2.7-5.5V, 16MHz, 32KB Flash, 1KB EEPROM, 2.5KB SRAM, USB Controller, 44-pin TQFP, Industrial Grade (-40°C to 85°C), Ext Osc", Case/Package=TQFP, Clock Frequency=16MHz, Manufacturer=Microchip, Manufacturer Part Number=ATMEGA32U4-AU, Max Operating Temperature=85°C, Max Supply Current=15mA, Max Supply Voltage=5.5V, Min Operating Temperature=-40°C, Min Supply Voltage=4.5V, Nominal Supply Voltage=5V, Package Body Material=Plastic, Package Equivalence Code=TQFP44,.47SQ,32, Package Shape=Square, Power Supplies=3/5, Supplier Part Number=ATMEGA32U4-AU-ND, Temperature Grade=INDUSTRIAL, ComponentLink1Description="Manufacturer URL", ComponentLink1URL=http://www.atmel.com/, ComponentLink2Description="ATmega16U4/32U4 Datasheet", ComponentLink2URL=http://www.atmel.com/dyn/resources/prod_documents/doc7766.pdf, ComponentLink3Description="ATmega16U4 ATmega32U4 Summary", ComponentLink3URL=http://www.atmel.com/dyn/resources/prod_documents/7766S.pdf, ComponentLink4Description=https://datasheet.ciiva.com:443/pdfs/VipMasterIC/IC/ATML/ATML-S-A0001723807/ATML-S-A0001723807-1.pdf?src-supplier=IHS+Markit, ComponentLink4URL=https://datasheet.ciiva.com:443/pdfs/VipMasterIC/IC/ATML/ATML-S-A0001723807/ATML-S-A0001723807-1.pdf?src-supplier=IHS+Markit, ComponentLink5Description=https://datasheet.ciiva.com/22651/1684411-22651233.pdf?src-supplier=Farnell, ComponentLink5URL=https://datasheet.ciiva.com/22651/1684411-22651233.pdf?src-supplier=Farnell, ComponentLink6Description=https://datasheet.ciiva.com/15122/getdatasheetpartid-116246-15122378.pdf?src-supplier=Verical, ComponentLink6URL=https://datasheet.ciiva.com/15122/getdatasheetpartid-116246-15122378.pdf?src-supplier=Verical, ComponentLink7Description=https://datasheet.ciiva.com/1157/1684411-1157762.pdf?src-supplier=Element14, ComponentLink7URL=https://datasheet.ciiva.com/1157/1684411-1157762.pdf?src-supplier=Element14, DatasheetVersion="revF, Nov-2010", Height - Seated (Max)=1.2mm, Interface=SPI,USB,USART, JESD-30 Code=S-PQFP-G44, Length=10mm, MPN=ATmega32U4-AU, Number of I/O Lines=26, PackageDescription="44-Pin Plastic Thin Quad Flat Pack, 10 x 10 x 1.0 mm Body, 0.8 mm Pitch (TQFP)", PackageReference=44ML, PackageVersion="rev.G, Jul-2007", Peripherals=POR,PWM,WDT, Pins=44, Pricing="1=5.29, 25=4.84, 100=4.39 (USD)", Qualification Status="Not Qualified", Reach SVHC Compliant=Yes, RevisionNote="DatasheetVersion updated. URLs added.", RoHS=Yes, RoHS Compliant=Yes, Stock=9921, Supplier=Digikey, Surface Mount=Yes, Technology=CMOS, Terminal Form="Gull Wing", Terminal Pitch=0.8mm, Terminal Position=QUAD, Width=10mm
USB: library part CMP-04767-000028-2, "CONN RCP USB2.0 TYP C 24P SMD RA", Current Rating=1.25A, Manufacturer Part Number=2171790001, Max Operating Temperature=85°C, Min Operating Temperature=-40°C, Voltage Rating=30V, Contact Material="Gold, Nickel", Gender=Receptacle, Height=3.36mm, NexarPartId=117190526, Number of Contacts=16, USB Standard="USB 2.0"
Y1: library part CMP-27762-006167-1, "Crystal 16MHz ±20ppm 18pF SMD-4 3.2mm x 2.5mm", Case/Package=CSMD, ESR (Equivalent Series Resistance)=70R, Frequency=16MHz, Frequency Stability=50ppm, Frequency Tolerance=20ppm, Load Capacitance=18pF, Manufacturer=Abracon, Max Operating Temperature=70°C, Min Operating Temperature=-20°C, Operating Frequency="16 MHz", Operating Frequency-Nom=160, Package Quantity=1000, Resistor Type=Ceramic, Supplier Part Number=535-9134-1-ND, Aging="3 PPM/FIRST YEAR", Category=Crystals, ComponentLink1Description=https://datasheet.ciiva.com:443/pdfs/VipMasterIC/IC/ABRC/ABRC-S-A0006116959/ABRC-S-A0006116959-1.pdf?src-supplier=IHS+Markit, ComponentLink1URL=https://datasheet.ciiva.com:443/pdfs/VipMasterIC/IC/ABRC/ABRC-S-A0006116959/ABRC-S-A0006116959-1.pdf?src-supplier=IHS+Markit, ComponentLink2Description=https://datasheet.ciiva.com/3175/abm8-3175964.pdf?src-supplier=Avnet, ComponentLink2URL=https://datasheet.ciiva.com/3175/abm8-3175964.pdf?src-supplier=Avnet, ComponentLink3Description=https://datasheet.ciiva.com/856/abm8-856355.pdf?src-supplier=Digikey, ComponentLink3URL=https://datasheet.ciiva.com/856/abm8-856355.pdf?src-supplier=Digikey, ComponentLink4Description=https://datasheet.ciiva.com/856/abm8-856356.pdf?src-supplier=Digikey, ComponentLink4URL=https://datasheet.ciiva.com/856/abm8-856356.pdf?src-supplier=Digikey, ComponentLink5Description=https://datasheet.ciiva.com/856/abm8-856357.pdf?src-supplier=Digikey, ComponentLink5URL=https://datasheet.ciiva.com/856/abm8-856357.pdf?src-supplier=Digikey, ComponentLink6Description=https://datasheet.ciiva.com/16416/abm8-16416886.pdf?src-supplier=Future+Electronics, ComponentLink6URL=https://datasheet.ciiva.com/16416/abm8-16416886.pdf?src-supplier=Future+Electronics, Crystal/Resonator Type="PARALLEL - FUNDAMENTAL", Depth=2.5mm, Drive Level=10uW, ESR=70R, Height=0.031inch, JESD-609 Code=e4, Lead Free="Lead Free", Length=3.2mm, Manufacturer Part Number=ABM8-16.000MHZ-B2-T, Mount="Surface Mount", Mounting Technology="Surface Mount", Number of Pins=4, Packaging="Tape and Reel", Pricing="1=0.68, 10=0.593, 25=0.5612, 50=0.538, 100=0.5157, 250=0.48772, 500=0.46754, 1000=0.34577 (USD)", Radiation Hardening=No, REACH SVHC="No SVHC", Reach SVHC Compliant=Yes, RoHS=Yes, RoHS Compliant=Yes, Series=ABM8, Series Resistance=70R, Stock=20075, Supplier=Digikey, Terminal Finish=Nickel, Termination=SMD/SMT, Tolerance=20ppm, Width=2.5mm

## Free pads (board coordinates)
  round 160 hole 98 paste-99999 mask+0: 2(-420,-1010) 2(-420,1010) 2(420,-1010) 2(420,1010)

## Via types
v1: diameter 24, hole 12, L1 (Signal) to L4 (Signal), 34 vias
v2: diameter 32, hole 16, L1 (Signal) to L4 (Signal), 15 vias

## Nets (pads, with @x,y where several pads share a name; then routed paths per layer and width w, separated by ;. In a path a pad name is that pad's centre, name@x,y a point inside that pad or via, vN(x,y) a via of type N, cw(c..) or ccw(c..) an arc to the next point about the centre after c; other vN are vias at no path point)
A0: JP6.10 U2.36 | length 242.3
  L1 (Signal) w10: JP6.10 -380,80 -315.51,144.49 U2.36
A1: JP6.9 U2.37 | length 270.7
  L1 (Signal) w10: JP6.9 -309.61,110.39 -227.02,110.39 U2.37
A2: JP6.8 U2.38 | length 334.2
  L1 (Signal) w10: JP6.8 -390,-70 -390,-10 -298.5,81.5 U2.38
A3: JP6.7 U2.39 | length 397.7
  L1 (Signal) w10: JP6.7 -370,-150 -370,-30 -290,50 U2.39
A4: JP6.6 U2.40 | length 461.2
  L1 (Signal) w10: JP6.6 -440,-310 -352,-222 -352,-52 -281.5,18.5 U2.40
A5: JP6.5 U2.41 | length 533.3
  L1 (Signal) w10: JP6.5 -334,-314 -334,-59.46 -287.54,-12.99 U2.41
AREF: C5.2 U2.42 | length 169.4
  L1 (Signal) w15: C5.2 -285,-55 -274.49,-44.49 U2.42
D0_RX: JP7.9 U2.20 | length 283.7
  L1 (Signal) w10: U2.20 275.51,144.49 JP7.9
D1_TX: JP7.10 U2.21 | length 255.3
  L1 (Signal) w10: U2.21 344.02,175.98 JP7.10
D2: JP7.8 U2.19 | length 350.8
  L1 (Signal) w10: U2.19 272.99,112.99 383,2.98 383,-63 JP7.8
D3: JP7.7 U2.18 | length 418.6
  L1 (Signal) w10: U2.18 271.91,81.5 365,-11.6 365,-145 JP7.7
D4: JP7.11 U2.25 | length 447.6
  L1 (Signal) w10: U2.25 94.49,306.54 115.71,327.76 167.76,327.76 174.52,321 250.52,245 330,245 395,180 JP7.11
D5: JP6.12 U2.31 | length 428.7
  L1 (Signal) w10: JP6.12 -374.24,345.76 -120.76,345.76 -95.18,320.18 -95.18,275.1 U2.31
D6: JP7.13 S1.3 S1.4 U2.27 | length 1047.2
  L1 (Signal) w10: U2.27 31.5,306.54 81.95,357 82.25,357 89.01,363.76 182.67,363.76 246.43,300 345.98,300 425.98,380 JP7.13 ; v1(395,615) 395,673.66 S1.3 S1.4
  L4 (Signal) w10: v1(395,615) 395,489.07 ccw(c440,480) 394.1,479.22 395,425 397.93,422.07 JP7.13
D7: JP6.4 U2.1 | length 462.6
  L1 (Signal) w10: JP6.4 -440,-506.82 -157.48,-224.3 U2.1
D8: JP7.14 S3.3 S3.4 U2.28 | length 1409
  L1 (Signal) w10: S3.4 S3.3 -62.01,632.01 -12.65,582.65 337.35,582.65 JP7.14 440,470 300,330 241.89,330 190.12,381.76 75.22,381.76 54.71,361.25 0,306.54 U2.28
D9: JP6.14 R10.1 U2.29 | length 711.3
  L1 (Signal) w10: R10.1 -355.39,604.61 -439.95,520.05 JP6.14 JP6.14 -431.35,480 -333.35,382 -92,382 -34.1,324.1 -34.1,277.02 U2.29
D10: JP6.13 R9.1 U2.30 | length 929.1
  L1 (Signal) w10: JP6.13 -356.81,380 -340.57,363.76 -104.66,363.76 -62.38,321.48 -62.38,275.02 U2.30 ; R9.1 -330,760 v1(-300,730)
  L4 (Signal) w10: JP6.13 -295,525 -295,623.11 -300,628.11 v1(-300,730)
D11: JP7.6 U2.12 | length 338.8
  L1 (Signal) w10: U2.12 287.48,-107.48 385,-205 385,-265 JP7.6
D12: JP7.12 S2.3 S2.4 U2.26 | length 1192.6
  L1 (Signal) w10: U2.26 62.99,306.54 102.21,345.76 175.21,345.76 240.98,280 JP7.12 ; S2.4 S2.3 167.99,626.03 177.92,616.11 193.89,616.11 v1(195,615)
  L4 (Signal) w10: v1(195,615) 197.68,612.32 222.68,612.32 365,470 365,355 JP7.12
D13: JP6.11 U2.32 | length 421.7
  L1 (Signal) w10: JP6.11 -292.24,327.76 -137.76,327.76 -128.43,318.43 -128.43,276.85 U2.32
D+: R5.2 U2.4 | length 578.8
  L1 (Signal) w10: U2.4 -62.99,-236.23 15,-314.22 v1(15,-345) ; v1(34.75,-665.23) 35,-665.48 R5.2
  L4 (Signal) w10: v1(15,-345) 12.32,-347.68 12.32,-642.8 v1(34.75,-665.23)
D-: R7.2 U2.3 | length 565.2
  L1 (Signal) w10: U2.3 -95,-174.92 -95,-255 v1(-80,-270) ; R7.2 v1(-25,-665)
  L4 (Signal) w10: v1(-80,-270) -25,-325 v1(-25,-665)
GND: C1.1 C2.1 C3.1 C4.1 C5.1 C6.1 C7.1 C8.1 C9.1 D1.1 JP6.2 JP6.3 JP7.1 R8.2 R11.2 R12.2 S1.1 S1.2 S2.1 S2.2 S3.1 S3.2 U1.2 U2.5 U2.15 U2.23 U2.35 U2.43 USB.A1-B12 USB.B1-A12 Y1.2 Y1.4 | length 2697.1
  L1 (Signal) w10: v2(-330,550) -275.26,550 C9.1 -271.36,552.92 -248.44,530 -205.83,530 Y1.2 ; S3.2 S3.1 -187,675.66 -187,637 -165,615 v1(-145,615) ; v1(-175,-730) R11.2 ; USB.A1-B12 -121.22,-829.92 v2(-121.22,-878.13) ; Y1.4 -89.06,434.88 -58.67,434.88 -53.79,430 v1(-50,430) ; S2.2 S2.1 43,675.66 43,637 65,615 v1(85,615) ; R12.2 v1(95,-635) ; v2(121.92,-878.13) 121.92,-829.22 USB.B1-A12 ; S1.2 272.02,676.64 272.5,676.16 272.5,637.5 294.5,615.5 v1(314.5,615.5)
  L1 (Signal) w15: JP6.2 -380,-720 v1(-345,-685) ; JP6.3 -388.81,-620 -346.72,-577.91 -346.72,-571.72 v1(-345,-570) ; v2(-345,230) -341.75,233.25 -341.75,243.25 -298.99,286.01 -273.52,286.01 R8.2 ; C1.1 -295.59,-420.59 v1(-295,-420) ; v2(-290,-270) -290,-215.59 C5.1 ; U2.43 -223.92,-75.49 -114.49,-75.49 v2(-114,-75) ; U2.35 -222.76,174.33 -176.05,174.33 -157.22,155.5 -114.1,155.5 -109.6,160 v2(-105,160) ; v1(-215,-320) D1.1 ; U1.2 v2(-115,-500) ; U2.5 -30.75,-173.66 -30.75,-115.75 v2(-30,-115) ; C8.1 35.83,501.74 37.56,500 v1(40,500) ; C2.1 C3.1 C4.1 140.93,-410.34 165.34,-410.34 v2(190,-435) ; C6.1 C7.1 170.59,-355.59 v2(190,-375) ; v2(125,175) 125,175.09 157.48,207.57 U2.23 ; U2.15 226.06,-11.34 269.06,-11.34 290.4,10 v2(295,10)
HWB: R8.1 U2.33 | length 64.9
  L1 (Signal) w10: R8.1 -163.77,290 -157.48,283.71 U2.33
MISO: JP7.4 U2.11 | length 472.5
  L1 (Signal) w10: U2.11 161.5,-178.43 178.43,-178.43 370,-370 370,-450 JP7.4
MOSI: JP7.3 U2.10 | length 622.5
  L1 (Signal) w10: U2.10 125.98,-235.98 135,-245 215,-245 350,-380 350,-530 JP7.3
NetC8_2: C8.2 U2.16 Y1.1 | length 902
  L1 (Signal) w10: v1(-20,20) -18.5,18.5 U2.16 ; v1(-10,350) -10,429.65 -99.8,519.45 Y1.1 -60.55,519.45 -39.76,540.24 -34.2,545.8 -14.47,545.8 C8.2
  L4 (Signal) w10: v1(-20,20) -20,337.14 -10,347.14 v1(-10,350)
NetC9_2: C9.2 U2.17 Y1.3 | length 904.3
  L1 (Signal) w10: C9.2 -271.36,501.74 -235.84,466.22 -210.94,466.22 Y1.3 -190.35,450.55 -149.8,410 -81.89,410 -64.57,392.68 -52.68,392.68 v1(-50,390) ; v1(-65,50) U2.17
  L4 (Signal) w10: v1(-65,50) -65,357.09 -50.14,371.95 -50.14,389.86 v1(-50,390)
NetD1_2: D1.2 R2.1 | length 47.7
  L1 (Signal) w10: D1.2 -70.39,-320 R2.1
NetD2_2: D2.2 F1.2 R1.1 | length 341.2
  L1 (Signal) w15: D2.2 -74.2,-626.15 -74.2,-606.24 -42.49,-574.53 R1.1 129.53,-574.53 170,-615 F1.2
NetD3_1: D3.1 R3.2 | length 258.3
  L1 (Signal) w10: D3.1 105,520 120,535 285,535 300,520 R3.2@300,494.61
NetD4_1: D4.1 R6.2 | length 60
  L1 (Signal) w10: D4.1 180.08,494.61 R6.2
NetD5_1: D5.1 R9.2 | length 62
  L1 (Signal) w10: D5.1 -404.61,815.08 R9.2
NetD6_1: D6.1 R10.2 | length 62
  L1 (Signal) w10: D6.1 -404.61,690.08 R10.2
NetR5_1: R5.1 USB.A6 USB.B6 | length 148.1
  L1 (Signal) w10: USB.A6 -9.84,-794.84 15.63,-769.37 R5.1@29.53,-769.37 ; USB.B6 29.53,-765.08 R5.1
NetR7_1: R7.1 USB.A7 USB.B7 | length 172.6
  L1 (Signal) w10: R7.1 -29.53,-764.13 -29.53,-855.62 -23.67,-861.48 3.98,-861.48 9.84,-855.62 USB.A7
NetR11_1: R11.1 USB.A5 | length 106
  L1 (Signal) w10: R11.1 -75.39,-764.61 -49.21,-790.79 USB.A5
NetR12_1: R12.1 USB.B5 | length 106.4
  L1 (Signal) w10: USB.B5 68.9,-781.1 95,-755 R12.1
RAW: C1.2 D2.1 JP6.1 U1.1 U1.3 | length 681.4
  L1 (Signal) w15: JP6.1 -315,-820 -215,-720 -215,-633.06 D2.1 -211.94,-579.38 -210,-577.44 v2(-210,-575) ; C1.2@-245,-460.59 -245,-540 v2(-210,-575) ; C1.2 -168.78,-460 U1.1 ; U1.3 -172.87,-537.4 -178.37,-542.89 -178.37,-543.37 v2(-210,-575)
RST: JP7.5 R4.2 U2.13 | length 721.9
  L1 (Signal) w10: R4.2@280,-160.39 220.39,-160.39 220,-160 210,-160 155,-105 155,-81.84 160.86,-75.98 U2.13 225.39,-75 v1(300,-75)
  L4 (Signal) w10: v1(300,-75) 380,-155 380,-360 JP7.5
RXLED: R6.1 U2.8 | length 688.8
  L1 (Signal) w10: U2.8 65,-172.4 v1(65,-15) ; v1(240,395) R6.1
  L4 (Signal) w10: v1(65,-15) 65,215 237.32,387.32 237.32,388.53 238.79,390 v1@240,390
SCK: JP7.2 U2.9 | length 732.9
  L1 (Signal) w10: U2.9 94.49,-229.94 127.54,-263 203,-263 330,-390 330,-610 JP7.2
SHIELD: USB.1 USB.2 USB.3 USB.4
TXLED: R3.1 U2.22 | length 316.2
  L1 (Signal) w10: U2.22 226.93,210 v1(300,210) ; v1(290,395) R3.1
  L4 (Signal) w10: v1(290,395) 290,370 300,360 v1(300,210)
UCAP: C6.2 U2.6 | length 170.2
  L1 (Signal) w10: U2.6 0,-245 49.37,-294.37 64.96,-294.37 C6.2
UVCC: C7.2 F1.1 U2.2 U2.7 USB.A4-B9 USB.B4-A9 | length 1436.4
  L1 (Signal) w10: U2.2 -124.33,-172.76 -124.33,-129.33 -75,-80 -10,-80 31.5,-121.5 U2.7 31.5,-226.5 79.68,-274.68 98.1,-274.68 98.42,-275 105,-275 122.28,-292.28 122.28,-292.68 134.02,-304.41 C7.2 137.02,-306.43 171.43,-306.43 230,-365 230,-730 216.69,-743.31 F1.1 160.16,-743.31 140.47,-762.99 122.01,-762.99 94.49,-790.51 94.49,-860.51 75,-880 -75,-880 -94.49,-860.51 USB.A4-B9
VCC: C2.2 C3.2 C4.2 D3.2 D4.2 D5.2 D6.2 R1.2 R2.2 R4.1 U1.5 U2.14 U2.24 U2.34 U2.44 | length 3952.7
  L1 (Signal) w10: D6.2 v1(-250,695) -252.47,697.47 -252.47,762.47 -310,820 D5.2 ; v1(-225,-155) -224.41,-154.41 U2.44 ; U2.34 -157.86,207.48 -147.68,197.3 -147.68,187.68 v1(-145,185) ; v1(38,160) 65,160 125.98,220.98 U2.24 ; v1(40,420) 55.47,435.47 D3.2 D4.2 ; v1(100,-90) 102.68,-87.32 102.68,-77.32 135.51,-44.49 U2.14 ; v1(240,-190) 253.65,-203.65 284.04,-203.65 R4.1
  L1 (Signal) w15: v2(-150,-375) -149.61,-374.61 R2.2 -65,-461.42 U1.5 -61.42,-465 -30,-465 -20.59,-455.59 C2.2 C3.2 C4.2 135,-490 109.53,-515.47 R1.2
  L4 (Signal) w10: v1(-250,695) -249.82,694.82 -249.82,668 -1.82,420 v1(40,420) 39,419 39,161 v1(38,160) 38,-28 52,-42 77,-42 100,-65 v1(100,-90) ; v1(-225,-155) -225,-215 -178.91,-261.09 -178.91,-356.09 -164.21,-370.79 -154.21,-370.79 v2(-150,-375) -145.79,-370.79 -135.79,-370.79 -125,-360 -125,-140 -65,-80 45,-80 55,-90 v1(100,-90) ; v2@-150,-370.79 -150,176.21 -145,181.21 v1(-145,185) ; v1(240,-190) 140,-90 v1(100,-90)
pads on no net: U1.4 USB.A8 USB.B8

## Polygon pours and split planes (outlines as drawn)
SHIELD on L1 (Signal) "SHIELD_L01_P006" (solid, pour order 6): -190,-850 -190,-1085 190,-1085 190,-850 150.39,-850 150.39,-905 -150.39,-905 -150.39,-850
SHIELD on L4 (Signal) "SHIELD_L02_P004" (solid, pour order 4): -190,-850 -190,-1085 190,-1085 190,-850 150.39,-850 150.39,-905 -150.39,-905 -150.39,-850
GND on L4 (Signal) "GND_L02_P005" (solid, pour order 5): 485,-1085 495,-1075 495,1070 480,1085 -485,1085 -495,1075 -495,-1075 -485,-1085

## Silkscreen, mask and mechanical layers (free items; w line width, h text height)
Top Overlay:
  text "D9" at -369,466 h28
  text "D8" at 321,466 h28
  text "D10" at -369,366 h28
  text "D6" at 321,366 h28
  text "D5" at -369,266 h28
  text "D12" at 301,266 h28
  text "D13" at -369,166 h28
  text "D4" at 321,166 h28
  text "A0" at -369,71 h28
  text "D1" at 331,66 h28
  text "A1" at -369,-29 h28
  text "D0" at 321,-34 h28
  text "A2" at -369,-129 h28
  text "D2" at 321,-134 h28
  text "A3" at -369,-229 h28
  text "D3" at 323.99,-239 h28
  text "A4" at -369,-329 h28
  text "D11" at 310,-334 h28
  text "A5" at -369,-429 h28
  text "RST" at 296,-439 h28
  text "D7" at -369,-529 h28
  text "MI" at 333.32,-539 h28
  text "GND" at -369,-629 h28
  text "MO" at 321,-639 h28
  text "GND" at -369,-729 h28
  text "SCK" at 296,-739 h28
  text "RW" at -369,-829 h28
  text "GND" at 291,-839 h28
Bottom Overlay:
  text "Shadowfang Rev 1.1" at 279.67,-571 h28 r90
  text "20251009" at 329,-571 h28 r90
Mechanical 1:
  the board outline again, w10